# Altium PCB PCB2.PcbDoc
Units mil, origin at the board's own origin, x right, y up, seen from the top; angles counter-clockwise.
Board outline 2555 x 1775 mil, 2 copper layers (Top Layer, Bottom Layer); 37 components, 27 nets, 143 pads, 22 vias.
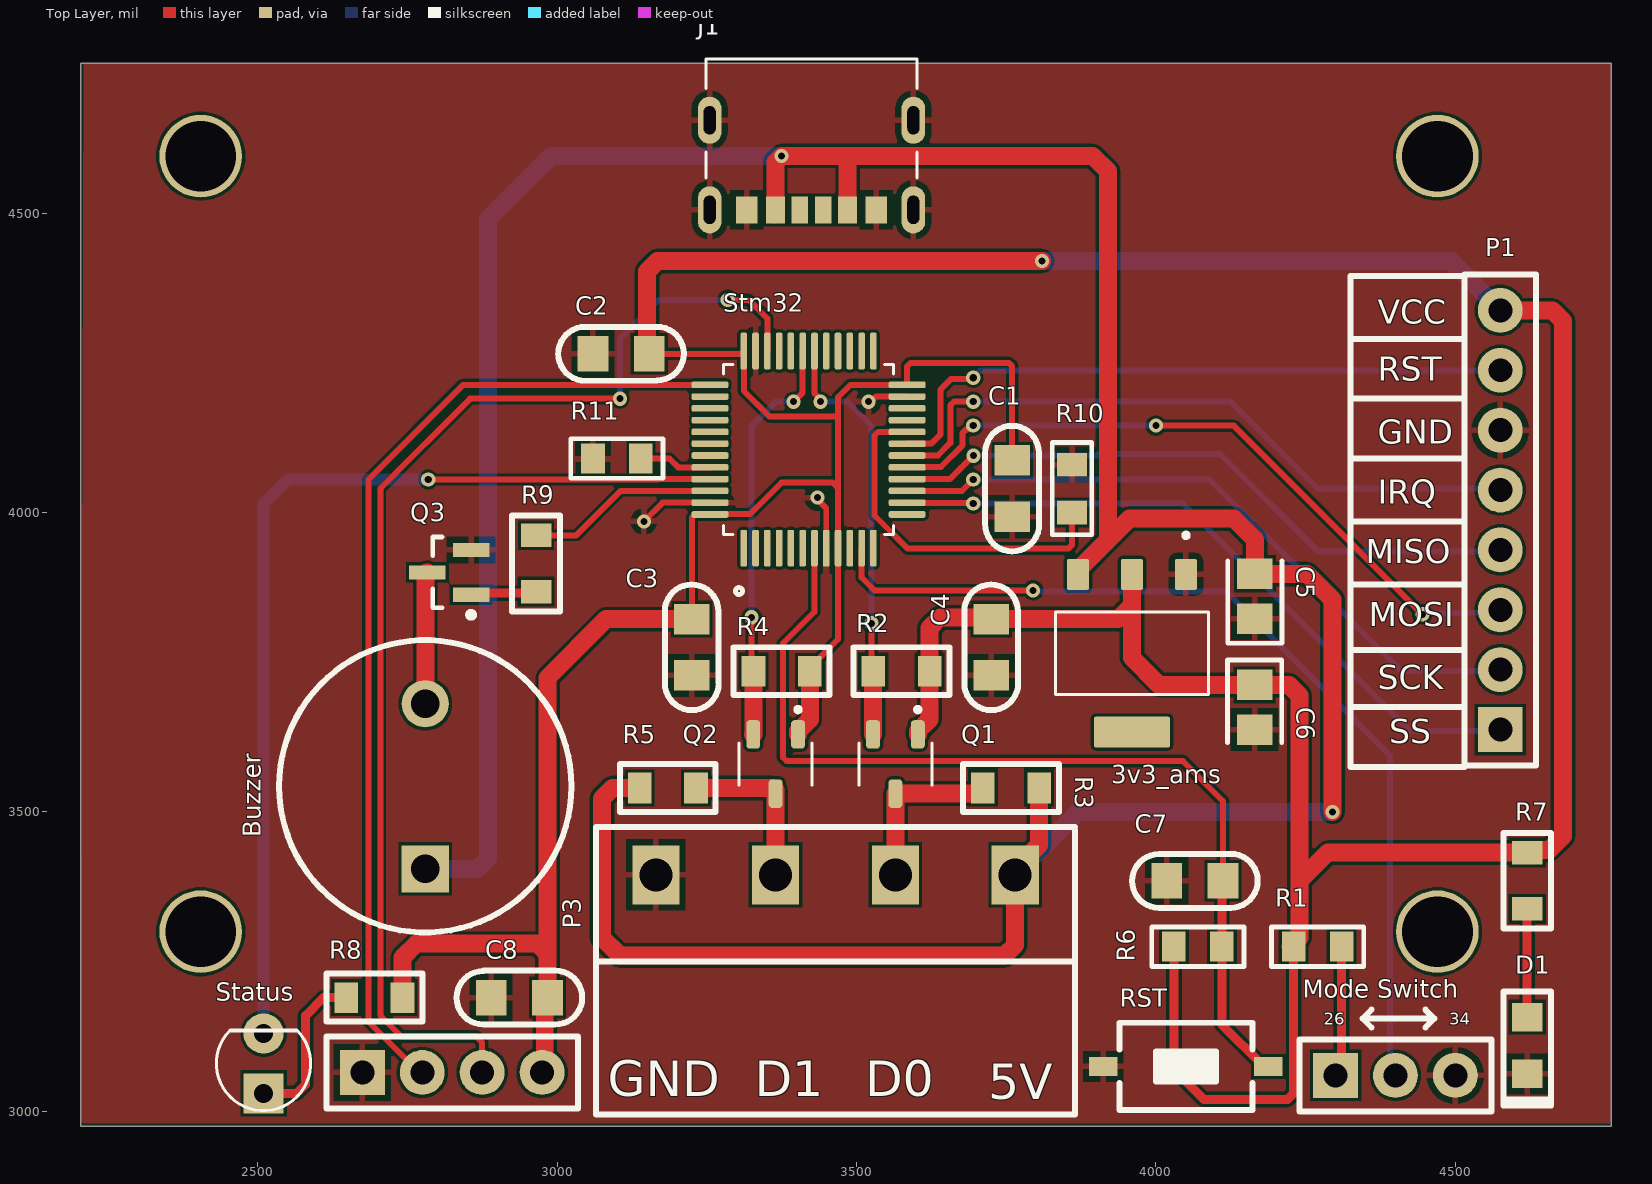
[diagram p0: Top Layer view]
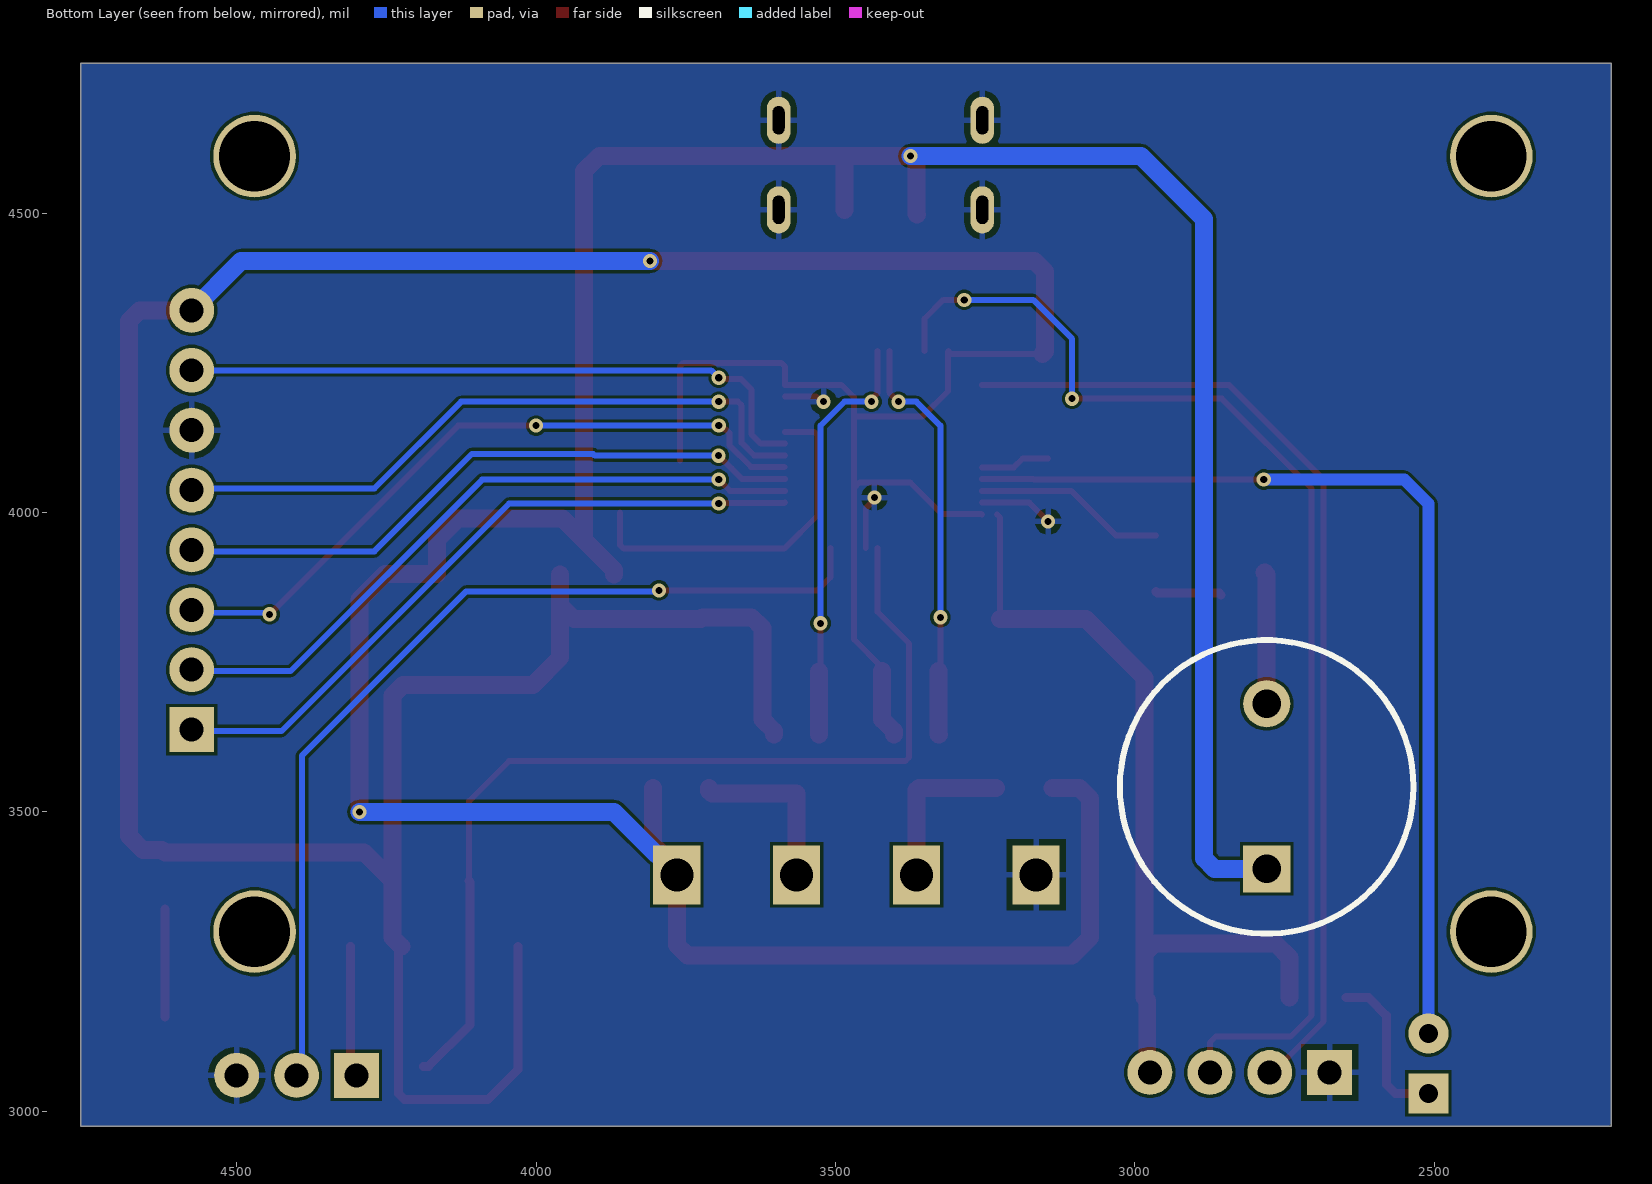
[diagram p1: Bottom Layer view, seen from below]

## Layer stack, top to bottom
Top Solder: solder mask 0.4, Solder Resist, Dk 3.5
Top Layer: signal copper 1.4
Dielectric 1: dielectric 12.6, FR-4, Dk 4.8
Bottom Layer: signal copper 1.4
Bottom Solder: solder mask 0.4, Solder Resist, Dk 3.5

## Board outline
2205,2975 2205,4750 4760,4750 4760,2975

## Design rules (kind name [scope] priority, off if disabled: settings)
Clearance [All] p1: gap=5 ignorepadtopadclearanceinfootprint=FALSE
PolygonConnect [All] p1: connectstyle=Relief reliefconductorwidth=10 reliefentries=4 polygonreliefangle="90 Angle" airgapwidth=10
RoutingVias [All] p1: holewidth=11.81 width=23.62 viastyle="Through Hole" minholewidth=11.81 minwidth=23.62 maxholewidth=11.81 maxwidth=23.62
SolderMaskExpansion [All] p1: expansion=4 istentingtop=FALSE
Width [All] p1: maxlimit=30 minlimit=10 preferedwidth=15 minimp=50.000000 maximp=50.000000 favimp=50.000000
30 further rules are at their usual default settings.

## Classes and differential pairs
component class Sheet2: C1 C2 C3 C4 C5 C6 C7 C8 D1 D2 J1 LS1 P1 P2 P3 P4 Q1 Q2 Q3 R1 R2 R3 R4 R5 R6 R7 R8 R9 R10 R11 RST U1 U2

## Components (designator, comment, footprint, x,y, rotation, side; value= is the part's Value field where it differs from the comment)
3v3_ams "AMS1117-3.3" SOT229P700X180-4N 3960,3765 r270 top (schematic designator U1)
Buzzer "SPEAKER" speaker 2780,3542.8 r90 top (schematic designator LS1)
C1 "Cap Non-pol" C-NP-0805 3760,4040 r90 top value=105
C2 "Cap Non-pol" C-NP-0805 3107,4265 r0 top value=105
C3 "Cap Non-pol" C-NP-0805 3225,3775 r90 top value=105
C4 "Cap Non-pol" C-NP-0805 3725,3775 r90 top value=105
C5 "1uF" C2012-0805 4165,3860 r90 top
C6 "1uF" C2012-0805 4165,3675 r270 top
C7 "Cap Non-pol" C-NP-0805 4065,3385 r180 top value=104
C8 "Cap Non-pol" C-NP-0805 2937,3190 r180 top value=104
D1 "LED" "LED-0805 RED" 4620,3110 r270 top
J1 "UJC-HP-3-SMT-TR" CUI_UJC-HP-3-SMT-TR 3424.92,4505.39 r180 top
"Mode Switch" "Header 3" "Header 3" 4300,3060 r0 top (schematic designator P2)
P1 "Header 8" "Header 8" 4575,3637.5 r90 top
P3 "BIG Header 4" "BIG_Header 4" 3765,3395 r180 top
P4 "Header 4" "Header 4" 2675,3065 r0 top
Q1 "AO3400A" SOT95P280X125-3N 3565,3580 r270 top
Q2 "AO3400A" SOT95P280X125-3N 3365,3580 r270 top
Q3 "C1815" "SOT23 [C1815]" 2820,3900 r180 top
R1 "RES_SMD_0805" "DIEN TRO 0805" 4270,3275 r180 top value=100R
R2 "RESISTOR" R-0805 3575,3735 r0 top value=10k
R3 "RESISTOR" R-0805 3758,3540 r0 top value=10k
R4 "RESISTOR" R-0805 3375,3735 r0 top value=10k
R5 "RESISTOR" R-0805 3185,3540 r180 top value=10k
R6 "RES_SMD_0805" "DIEN TRO 0805" 4070,3275 r180 top value=100R
R7 "RESISTOR" R-0805 4620,3385 r270 top value=330
R8 "RESISTOR" R-0805 2695,3190 r180 top value=330
R9 "RESISTOR" R-0805 2965,3915 r270 top value=110
R10 "RES_SMD_0805" "DIEN TRO 0805" 3860,4040 r90 top value=100R
R11 "RES_SMD_0805" "DIEN TRO 0805" 3100,4090 r0 top value=100R
RST "SW-SMD" SW-SMD 4050,3075 r0 top (schematic designator S1)
Status "LED" "LED-0 3mm RED" 2510,3080 r180 top (schematic designator D2)
Stm32 "STM32F103C8T6" QFP50P900X900X160-48N 3420,4105 r90 top (schematic designator U2)
? "Comment" "LO KHOAN 3MM" 2405,3300 r0 top
? "Comment" "LO KHOAN 3MM" 4470,3300 r0 top
? "Comment" "LO KHOAN 3MM" 4470,4595 r0 top
? "Comment" "LO KHOAN 3MM" 2405,4595 r0 top

## Footprints (in the part's own frame and the unit in brackets; to place one, negate y for a bottom-side part, rotate by r counter-clockwise, add the part's x,y. Pads: shape width x height; smd on the part's side, far side on the other; paste and mask are expansions set on the pad)
"BIG_Header 4" [mm]
  rect 2x2.5 hole 1.4: 1(0,0) 1(0,0) 2(5.08,0) 2(5.08,0) 3(10.16,0) 3(10.173,0) 4(15.24,0)
  silkscreen extent -2.54,-2.03 17.78,10.17, body extent -2.5,-1.75 17.74,10.25, height 3.15
C2012-0805 [mm] "Capacitor Chip 0805 package"
  rect 1.3x1.5 smd: 1(-0.945,-0.007) 2(0.955,-0.007)
  silkscreen extent -1.99,-1.16 1.51,1.14, body extent -0.89,-0.58 0.89,0.58, height 0.79
C-NP-0805 [mm] "Chip Capacitor; Non-polarized; Body 2.0 x 1.3 mm (LxW typ) [2012]"
  rect 1.3x1.5 smd: 1(-1.194,0) 2(1.194,0)
  silkscreen extent -2.67,-1.14 2.66,1.14, body extent -0.8,-0.43 0.8,0.43, height 0.79
CUI_UJC-HP-3-SMT-TR [mm]
  rect 0.7x1.15 smd: A5(-0.5,0.005) B5(0.5,0.005)
  rect 0.8x1.15 smd: A9(1.52,0.005) B9(-1.52,0.005)
  rect 0.9x1.15 smd: A12(2.75,0.005) B12(-2.75,0.005)
  oval 1x2 hole 0.5 slot 1.2 at 90 deg: S1(-4.32,0) S2(4.32,0) S3(-4.32,-3.8) S4(4.32,-3.8)
  silkscreen extent -4.47,-6.4 4.47,-1.35, body extent -4.47,-4.28 4.47,2.62, height 1.93
"DIEN TRO 0805" [mil] "Chip Resistor; Body 2.0 x 1.3 mm (LxW typ)"
  rect 39.37x50 smd: 1(-40,0) 2(40,0)
  silkscreen extent -77,-33 77,33, body extent -39,-25 39,25, height 31
"Header 3" [mil] "Connector; Header; 3 Position; Solder Pad 35mil"
  rect 75x75 hole 40: 1(0,0)
  round 75 hole 40: 2(100,0) 3(200,0)
  silkscreen extent -60,-60 260,60, body extent -50,-50 250,50, height 83
"Header 4" [mil] "Connector; Header; 4 Position; Solder Pad 35mil"
  rect 75x75 hole 40: 1(0,0)
  round 75 hole 40: 2(100,0) 3(200,0) 4(300,0)
  silkscreen extent -60,-60 360,60, body extent -50,-50 350,50, height 330
"Header 8" [mil] "Connector; Header; 8 Position; Solder Pad 35mil"
  rect 75x75 hole 40: 1(0,0)
  round 75 hole 40: 2(100,0) 3(200,0) 4(300,0) 5(400,0) 6(500,0) 7(600,0) 8(700,0)
  silkscreen extent -60,-60 760,60, body extent -50,-50 750,50, height 330
"LED-0 3mm RED" [mil] "Typical LED; RED; 2 Leads; Solder Pad 35mil"
  rect 67x67 hole 32: 1(0,50)
  round 67 hole 32: 2(0,-50)
  silkscreen extent -79,-56 79,79, body extent -64,-66 66,64, height 207
"LED-0805 RED" [mm] "Chip LED; RED; Body 2.0 x 1.3 mm (LxW typ) [2012]"
  rect 1.2x1.3 smd: 1(-1.204,0) 2(1.204,0)
  silkscreen extent -2.29,-1.02 2.54,1.02, body extent -1.01,-0.62 1.01,0.63, height 1.1
"LO KHOAN 3MM" [mil]
  round 138 hole 118.1: 1(0,0)
QFP50P900X900X160-48N [mm]
  rrect50% 1.56x0.28 smd: 1(-4.18,2.75) 2(-4.18,2.25) 3(-4.18,1.75) 4(-4.18,1.25) 5(-4.18,0.75) 6(-4.18,0.25) 7(-4.18,-0.25) 8(-4.18,-0.75) 9(-4.18,-1.25) 10(-4.18,-1.75) 11(-4.18,-2.25) 12(-4.18,-2.75) 25(4.18,-2.75) 26(4.18,-2.25) 27(4.18,-1.75) 28(4.18,-1.25) 29(4.18,-0.75) 30(4.18,-0.25) 31(4.18,0.25) 32(4.18,0.75) 33(4.18,1.25) 34(4.18,1.75) 35(4.18,2.25) 36(4.18,2.75)
  rrect50% 0.28x1.56 smd: 13(-2.75,-4.18) 14(-2.25,-4.18) 15(-1.75,-4.18) 16(-1.25,-4.18) 17(-0.75,-4.18) 18(-0.25,-4.18) 19(0.25,-4.18) 20(0.75,-4.18) 21(1.25,-4.18) 22(1.75,-4.18) 23(2.25,-4.18) 24(2.75,-4.18) 37(2.75,4.18) 38(2.25,4.18) 39(1.75,4.18) 40(1.25,4.18) 41(0.75,4.18) 42(0.25,4.18) 43(-0.25,4.18) 44(-0.75,4.18) 45(-1.25,4.18) 46(-1.75,4.18) 47(-2.25,4.18) 48(-2.75,4.18)
  silkscreen extent -6.15,-3.6 3.6,3.6, body extent -4.5,-4.5 4.5,4.5, height 1.6
R-0805 [mm] "Chip Resistor; Body 2.0 x 1.3 mm (LxW typ) [2012]"
  rect 1x1.3 smd: 1(-1.194,0) 2(1.194,0)
  silkscreen extent -2.03,-1.02 2.03,1.02, body extent -0.95,-0.65 0.95,0.65, height 0.63
"SOT23 [C1815]" [mm] "SOT23, 3-Leads, Body 3.0x2.6mm (max), Pitch 0.95mm, IPC Medium Density"
  rect 1.55x0.6 smd: 1(-0.925,0.95) 2(-0.925,-0.95) 3(0.925,0)
  silkscreen extent -1.05,-1.5 0.7,1.92, body extent -1.53,-1.5 1.53,1.5, height 1.1
SOT95P280X125-3N [mm]
  rrect50% 1.21x0.59 smd: 1(-1.255,0.95) 2(-1.255,-0.95) 3(1.255,0)
  silkscreen extent -2.41,-1.55 0.9,1.55
SOT229P700X180-4N [mm]
  rrect15% 1.31x0.93 smd: 1(-3.345,2.29) 2(-3.345,0) 3(-3.345,-2.29)
  rrect15% 1.31x3.24 smd: 4(3.345,0)
  silkscreen extent -5.1,-3.25 1.75,3.25, body extent -3.5,-3.25 3.5,3.25, height 1.8
speaker [mm] "Speaker footprint"
  rect 2x2 hole 1.2: 1(-3.5,0)
  round 2 hole 1.2: 2(3.5,0)
  silkscreen extent -6.2,-6.2 6.2,6.2, body extent -6.2,-6.2 6.2,6.2, height 10.02
SW-SMD [mm] "Switch SMD type"
  rect 1.2x0.8 smd: 1(-3.5,0) 2(3.5,0)
  silkscreen extent -2.82,-1.85 2.82,1.85, body extent -3.05,-1.85 3.05,1.85, height 2.5

## Part data
3v3_ams: "Sot223/Pkg 1-Amp 3.3-Volt Low Drop Out Voltage Regulatator", Package="SOT-223 Seeed Technology", Availability="Not in stock", Check_prices=https://www.snapeda.com/parts/AMS1117-3.3/Advanced+Monolithic+Systems/view-part/?ref=eda, MF="Advanced Monolithic Systems", MP=AMS1117-3.3, Price=None, SnapEDA_Link=https://www.snapeda.com/parts/AMS1117-3.3/Advanced+Monolithic+Systems/view-part/?ref=snap
C1 C2 C3 C4 C7 C8: "Non-polarized Capacitor", LatestRevisionDate=17-Jul-2002, LatestRevisionNote="Re-released for DXP Platform.", PackageReference=RAD-0.3, Published=8-Jun-2000, Publisher="Altium Limited"
C5 C6: library part Capacitor, "Capacitor", Volt=16V, AEMS Code=2100341, ComponentLink1Description="Digikey Part Link", ComponentLink2Description="Open Datasheet", ComponentLink2URL=H:\LIBRARY\LIBRARY.Datasheet\, Published=13-April-2009, Publisher="Hoang Nguyen", Vendor=Digikey
D1 Status: "Typical LED", LatestRevisionDate=08-Jul-2005, LatestRevisionNote="Mech Layer 1 removed.", PackageReference=LED-1, Published=8-Jun-2000, Publisher="Altium Limited"
J1: Package=None, Availability=Unavailable, MP=UJC-HP-3-SMT-TR, Price=None
"Mode Switch": "Header, 3-Pin", LatestRevisionDate=17-Jul-2002, LatestRevisionNote="Re-released for DXP Platform.", Publisher="Altium Limited"
P1: "Header, 8-Pin", LatestRevisionDate=17-Jul-2002, LatestRevisionNote="Re-released for DXP Platform.", Publisher="Altium Limited"
P3: library part "BIG_Header 4"
P4: "Header, 4-Pin", LatestRevisionDate=17-Jul-2002, LatestRevisionNote="Re-released for DXP Platform.", Publisher="Altium Limited"
Q1 Q2: "Trans MOSFET N-CH 30V 5.7A 3-Pin SOT-23", Package=None, Availability=Unavailable, MP=AO3400A, Price=None
Q3: "Q2SC1815", PSpiceTemplate="Q^@REFDES %c %b %e @MODEL", COMPONENT=2SC1815, ComponentLink1Description="Digikey Part Link", ComponentLink2Description="Open Datasheet", ComponentLink2URL=H:\LIBRARY\LIBRARY.Datasheet\, Price=500VND, Published=13-April-2009, Publisher="Hoang Nguyen", Vendor=Digikey
R1 R6 R10 R11: "RES_0805", LatestRevisionDate=17-Jul-2002, LatestRevisionNote="Re-released for DXP Platform.", PackageReference=AXIAL-0.4, Published=8-Jun-2000, Publisher="Altium Limited"
R2 R3 R4 R5 R7 R8 R9: "Resistor", LatestRevisionDate=17-Jul-2002, LatestRevisionNote="Re-released for DXP Platform.", PackageReference=AXIAL-0.3, Published=8-Jun-2000, Publisher="Altium Limited"
RST: "Switch", LatestRevisionDate=17-Jul-2002, LatestRevisionNote="Re-released for DXP Platform.", PackageReference=SPST-2, Published=24-Mar-1999, Publisher="Altium Limited"
Stm32: "ARM® Cortex®-M3 STM32F1 Microcontroller IC 32-Bit 72MHz 64KB (64K x 8) FLASH 48-LQFP (7x7)", Package="LQFP-48 STMicroelectronics", Check_prices=https://www.snapeda.com/parts/STM32F103C8T6/STMicroelectronics/view-part/?ref=eda, MF=STMicroelectronics, MP=STM32F103C8T6, SnapEDA_Link=https://www.snapeda.com/parts/STM32F103C8T6/STMicroelectronics/view-part/?ref=snap
Buzzer: ComponentLink1Description="Digikey Part Link", ComponentLink2Description="Open Datasheet", ComponentLink2URL=H:\LIBRARY\LIBRARY.Datasheet\, Published=13-April-2009, Publisher="Hoang Nguyen", Vendor=Digikey

## Via types
v1: diameter 23.62, hole 11.81, Top Layer to Bottom Layer, 22 vias

## Nets (pads, with @x,y where several pads share a name; then routed paths per layer and width w, separated by ;. In a path a pad name is that pad's centre, name@x,y a point inside that pad or via, vN(x,y) a via of type N, cw(c..) or ccw(c..) an arc to the next point about the centre after c; other vN are vias at no path point)
+5: 3v3_ams.3 Buzzer.1 C5.2 J1.A9 J1.B9 P3.1 R3.2 R5.2 | length 5862.2
  Top Layer w30: R5.2 3092.57,3540 3075,3522.43 3075,3290 3105,3260 3747.43,3260 3765,3277.57 3765,3395 3765,3404.84 3805,3444.84 R3.2 ; J1.A9@3364.33,4497.56 3365.08,4498.31 3365.08,4585.08 3375.63,4595.63 3480,4595.63 ; J1.B9 3484.76,4590.87 3480,4595.63 ; 3v3_ams.3 3869.84,3904.17 3920,3954.33 ; v1(4295,3500) 4295,3855 4252.39,3897.61 C5.2 4165.28,3954.72 4130,3990 3955.67,3990 3920,3954.33 ; 3480,4595.63 3894.37,4595.63 3920,4570 3920,3954.33
  Bottom Layer w30: Buzzer.1 2867.43,3405 2885,3422.57 2885,4490 2990,4595 v1(3375,4595) ; P3.1@3765,3395 3765,3404.84 3789.37,3429.21 3799.21,3429.21 3870,3500 v1(4295,3500)
Boot0: R11.2 Stm32.44 | length 116.5
  Top Layer w10: R11.2@3145,4090 3187.7,4090 3202.22,4075.47 Stm32.44
Boot1: R10.1 Stm32.20 | length 600
  Top Layer w10: Stm32.20 3535.86,4134.53 3530,4128.67 3530,3995 3585,3940 3854.14,3940 3860,3945.86 R10.1
Bz: R9.1 Stm32.46 | length 321.1
  Top Layer w10: R9.1 3032,3962 3106.1,4036.1 Stm32.46
CLK: P4.2 Stm32.37 | length 1666.2
  Top Layer w10: P4.2 2770,3065 2685,3150 2685,4055 2843.27,4213.27 Stm32.37
D0: P3.2 Q1.3 R3.1 | length 288.3
  Top Layer w30: P3.2@3565,3395 Q1.3 3706.31,3530.59 3711,3535.28 R3.1
D1: P3.3 Q2.3 R5.1 | length 275.7
  Top Layer w30: R5.1 3361.02,3540 3364.75,3536.27 3364.75,3395.25 P3.3@3364.5,3395
DIO: P4.3 Stm32.34 | length 2021
  Top Layer w10: P4.3 2875,3115 2865,3125 2740,3125 2705,3160 2705,4040 2855,4190 v1(3105,4190) ; v1(3285,4355) 3320,4355 3351.1,4323.9 Stm32.34
  Bottom Layer w10: v1(3105,4190) 3105,4290 3170,4355 v1(3285,4355)
GND: 3v3_ams.1 "Mode Switch.3" C1.1 C2.1 C3.1 C4.1 C5.1 C6.2 C7.2 C8.2 D1.2 J1.A12 J1.B12 J1.S1 J1.S2 J1.S3 J1.S4 P1.6 P3.4 P4.1 Q3.2 R10.2 R11.1 RST.1 Stm32.8 Stm32.23 Stm32.35 Stm32.47 | length 282.2
  Top Layer w10: v1(3145,3985) 3176.42,4016.42 Stm32.47 ; v1(3435,4025) 3435,4021.31 3449.53,4006.79 Stm32.8 ; v1(3520,4185) 3523.69,4185 3532.27,4193.58 Stm32.23
Green: Status.2 Stm32.45 | length 1647.3
  Top Layer w10: v1(2785,4055) 3168.83,4055 3169.61,4055.79 Stm32.45
  Bottom Layer w20: Status.2 2510,4015 2550,4055 v1(2785,4055)
IRQ: P1.5 Stm32.18 | length 1131.2
  Top Layer w10: Stm32.18 3584.68,4095.27 3635.78,4095.27 3656.81,4116.3 3656.81,4179.07 3662.74,4185 v1(3695,4185)
  Bottom Layer w10: v1(3695,4185) 4125,4185 4270,4040 P1.5@4581.68,4040
MCU_D0: Q1.2 R2.1 Stm32.30 | length 707.2
  Top Layer w10: Stm32.30 3429.84,4198.84 3440,4188.69 v1(3440,4185) ; v1(3525,3815) 3525,3737.6 R2.1@3527.8,3734.8
  Top Layer w30: Q1.2 3527.8,3629.61 R2.1@3527.8,3734.8
  Bottom Layer w10: v1(3440,4185) 3485,4185 3525,4145 v1(3525,3815)
MCU_D1: Q2.2 R4.1 Stm32.31 | length 694.4
  Top Layer w10: v1(3325,3825) 3325,3738 R4.1 ; v1(3395,4185) 3410.16,4200.16 Stm32.31
  Top Layer w30: Q2.2 3327.8,3629.61 3327.8,3734.8 R4.1
  Bottom Layer w10: v1(3325,3825) 3325,4145 3365,4185 v1(3395,4185)
MISO: P1.4 Stm32.16 | length 1084.3
  Top Layer w10: Stm32.16 3655.79,4055.79 3673.9,4073.9 3694.84,4094.84 v1(3695.23,4094.84)
  Bottom Layer w10: v1(3695.23,4094.84) 3901.77,4094.84 3904.54,4097.61 4107.39,4097.61 4270,3935 P1.4@4584.23,3935
Mode: "Mode Switch.2" Stm32.11 | length 1592.4
  Top Layer w10: Stm32.11 3508.58,3891.42 3530,3870 v1(3795,3870)
  Bottom Layer w10: v1(3795,3870) 3796.81,3868.19 4116.81,3868.19 4391,3594 4391,3069 4400,3060
MOSI: P1.3 Stm32.17 | length 1171.7
  Top Layer w10: Stm32.17@3585.08,4075.98 3640.98,4075.98 3677.39,4112.39 3677.39,4132.97 3683.25,4138.83 3685.15,4138.83 3691.31,4145 v1(3695,4145) ; v1(4000,4145) 4130,4145 v1(4445,3830)
  Bottom Layer w10: v1(3695,4145) v1(4000,4145) ; v1(4445,3830) 4447.61,3832.61 4574.17,3832.61 P1.3@4581.56,3840
NetD1_1: D1.1 R7.2 | length 180.6
  Top Layer w15: D1.1 R7.2
NetD2_1: R8.2 Status.1 | length 271.6
  Top Layer w15: Status.1 2565,3030 2580,3045 2580,3160 2610,3190 R8.2
NetLS1_2: Buzzer.2 Q3.3 | length 221.1
  Top Layer w30: Buzzer.2 2780,3896.81 2783.19,3900 Q3.3
NetP2_1: "Mode Switch.1" R1.1 | length 219.1
  Top Layer w15: 4300,3060 4310,3070 R1.1
NetQ3_1: Q3.1 R9.2 | length 110.8
  Top Layer w15: Q3.1 2859.12,3865.3 2962.3,3865.3 R9.2
NRST: C7.1 R6.1 RST.2 Stm32.7 | length 1616.7
  Top Layer w10: Stm32.7 3429.84,3833.98 3377.4,3781.54 3377.4,3590.86 3383.26,3585 4045,3585 4112,3518 C7.1
  Top Layer w15: C7.1 4110,3383 R6.1 4110,3144.92 4179.92,3075 RST.2
Red: 
RST: P1.7 Stm32.19 | length 1085.2
  Top Layer w10: Stm32.19 3624.84,4114.84 3640,4130 3640,4205 3658.19,4223.19 3693.19,4223.19 v1(3695,4225)
  Bottom Layer w10: v1(3695,4225) 3695.17,4225 3707.67,4237.5 P1.7
SCK: P1.2 Stm32.15 | length 1131
  Top Layer w10: Stm32.15 3676.1,4036.1 v1(3695,4055)
  Bottom Layer w10: v1(3695,4055) 4090,4055 4410,3735 P1.2@4575.17,3735
SS: P1.1 Stm32.14 | length 1150.9
  Top Layer w10: Stm32.14 3585.08,4015.91 3694.09,4015.91 v1(3695,4015)
  Bottom Layer w10: v1(3695,4015) 4045,4015 4425,3635 P1.1@4577.51,3635
VCC: 3v3_ams.2 C1.2 C2.2 C3.2 C4.2 C6.1 C8.1 P1.8 P4.4 Q1.1 Q2.1 R1.2 R2.2 R4.2 R6.2 R7.1 R8.1 Stm32.9 Stm32.24 Stm32.36 Stm32.48 | length 8317.5
  Top Layer w10: C2.2 3311.22,4265 3311.73,4265.51 Stm32.36 3312.24,4269.06 3312.24,4202.76 3355,4160 3469.21,4160 ; C3.2 3225,3991.5 Stm32.48@3230.24,3996.73 ; Stm32.48 3255.94,3997.24 3322.24,3997.24 3375,4050 3460,4050 3469.21,4040.79 ; R4.2 3422,3740.91 3469.21,3788.12 Stm32.9 3469.21,4040.79 ; C1.2 3760,4244.14 3754.14,4250 3590.42,4250 3584.57,4244.14 Stm32.24 3490,4213.27 3469.21,4192.48 3469.21,4160 ; 3469.21,4040.79 3469.21,4160
  Top Layer w15: Q1.1@3598.29,3625.3 Q1.1 ; R6.2 4030,3070 4075.01,3024.99 4080,3020 4220,3020 4230,3030 4230,3270 R1.2@4225,3275
  Top Layer w30: R8.1 2742,3257 2765,3280 2967.43,3280 2984,3263.43 ; P4.4 2979.5,3069.5 2979.5,3185.5 C8.1 2984,3263.43 ; C2.2 3150,4269 3150,4402.43 3167.57,4420 v1(3810,4420) ; C3.2 3082,3822 2984,3724 2984,3263.43 ; Q2.1 3402.4,3634.84 3422,3654.44 R4.2 ; Q1.1 3602.4,3634.84 3622,3654.44 R2.2 3622,3807 3640,3825 3722,3825 C4.2 3937,3822 3960,3845 ; 3v3_ams.2 3960,3845 ; R1.2@4225,3275 4240,3290 4240,3385 ; P1.8 4662.43,4337.5 4680,4319.93 4680,3460 4656.69,3436.69 4624.69,3436.69 R7.1 4287,3432 4240,3385 ; 3960,3845 3960,3757.57 4005.38,3712.19 C6.1 4222.43,3712.19 4240,3694.62 4240,3385
  Bottom Layer w30: v1(3810,4420) 4492.5,4420 P1.8
pads on no net: 3v3_ams.4 ?.1 J1.A5 J1.B5 Stm32.1 Stm32.2 Stm32.3 Stm32.4 Stm32.5 Stm32.6 Stm32.10 Stm32.12 Stm32.13 Stm32.21 Stm32.22 Stm32.25 Stm32.26 Stm32.27 Stm32.28 Stm32.29 Stm32.32 Stm32.33 Stm32.38 Stm32.39 Stm32.40 Stm32.41 Stm32.42 Stm32.43

## Polygon pours and split planes (outlines as drawn)
GND on Bottom Layer "GND_L02_P001" (solid, pour order 1): 2205,4750 4760,4750 4760,2975 2210,2975 2205,2980
GND on Top Layer "GND_L01_P000" (solid, pour order 0): 2210,4750 4760,4750 4760,2975 4755,2980 2205,2980

## Silkscreen, mask and mechanical layers (free items; w line width, h text height)
Top Overlay:
  lines w10: 3065,3250 3860,3250 ; 4325,3675 4515,3675 ; 4325,3880 4515,3880 ; 4325,3985 4515,3985 ; 4325,4090 4510,4090 ; 4325,4190 4510,4190 ; 4325,4290 4515,4290 ; 4330,3770 4515,3770 ; 4360,3140 4345,3155 ; 4360,3170 4345,3155 ; 4450,3140 4465,3155 ; 4450,3170 4465,3155 ; 4345,3155 4465,3155 ; 4325,3575 4375,3575 4515,3575 4515,4395 4325,4395 4325,3575
  text "VCC" at 4370,4315 h40
  text "RST" at 4370,4220 h40
  text "GND" at 4370,4115 h40
  text "IRQ" at 4370,4015 h40
  text "MISO" at 4350,3915 h40
  text "MOSI" at 4355,3810 h40
  text "SCK" at 4370,3705 h40
  text "SS" at 4390,3615 h40
  text "26" at 4280,3145 h20
  text "34" at 4490,3145 h20
  text "GND" at 3085,3025 h60
  text "D1" at 3330,3025 h60
  text "D0" at 3515,3025 h60
  text "5V" at 3720,3020 h60
Mechanical 1:
  the board outline again, w10